# Altium PCB Sonic Sandbox.PcbDoc
Units mm, origin at the board's own origin, x right, y up, seen from the top; angles counter-clockwise.
Board outline 152.4 x 101.6 mm, 2 copper layers (Top Layer, Bottom Layer); 62 components, 47 nets, 175 pads, 0 vias.
Unrouted connection lines stored in the file: 111.
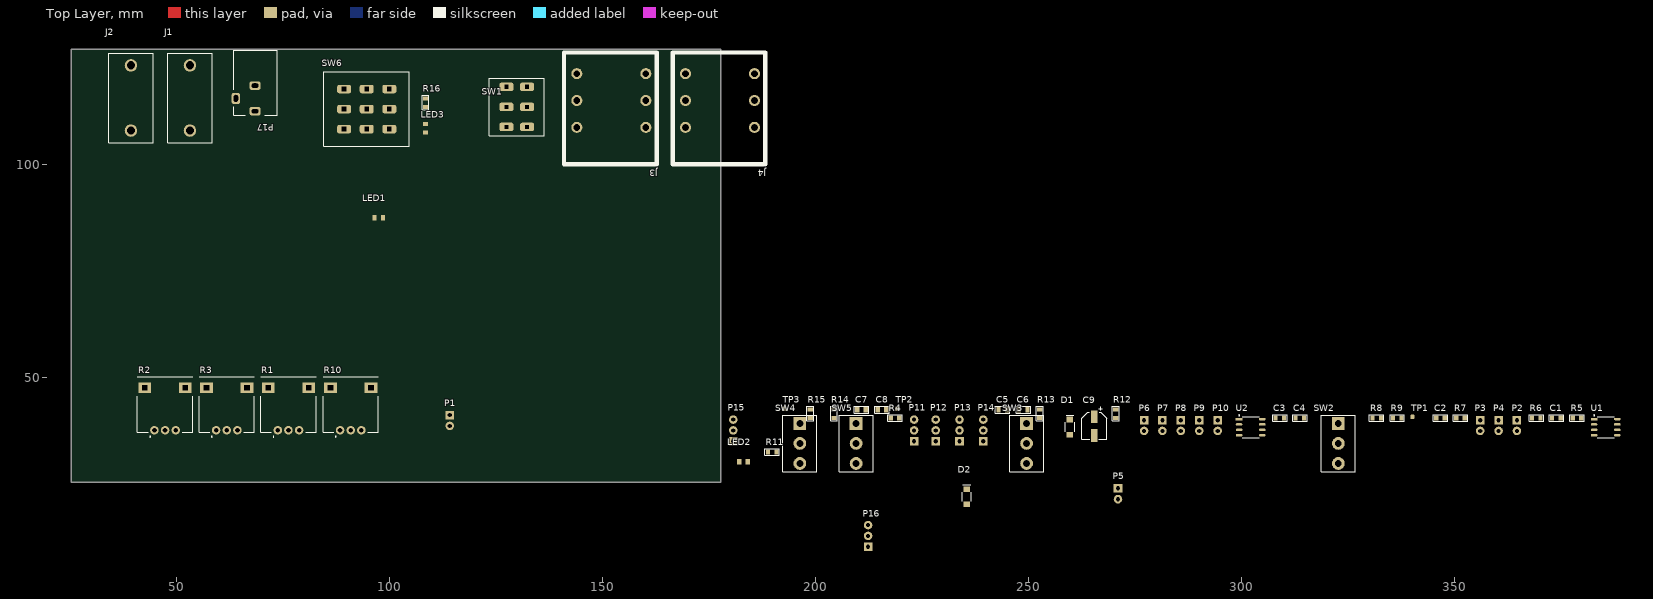
[diagram p0: Top Layer view]
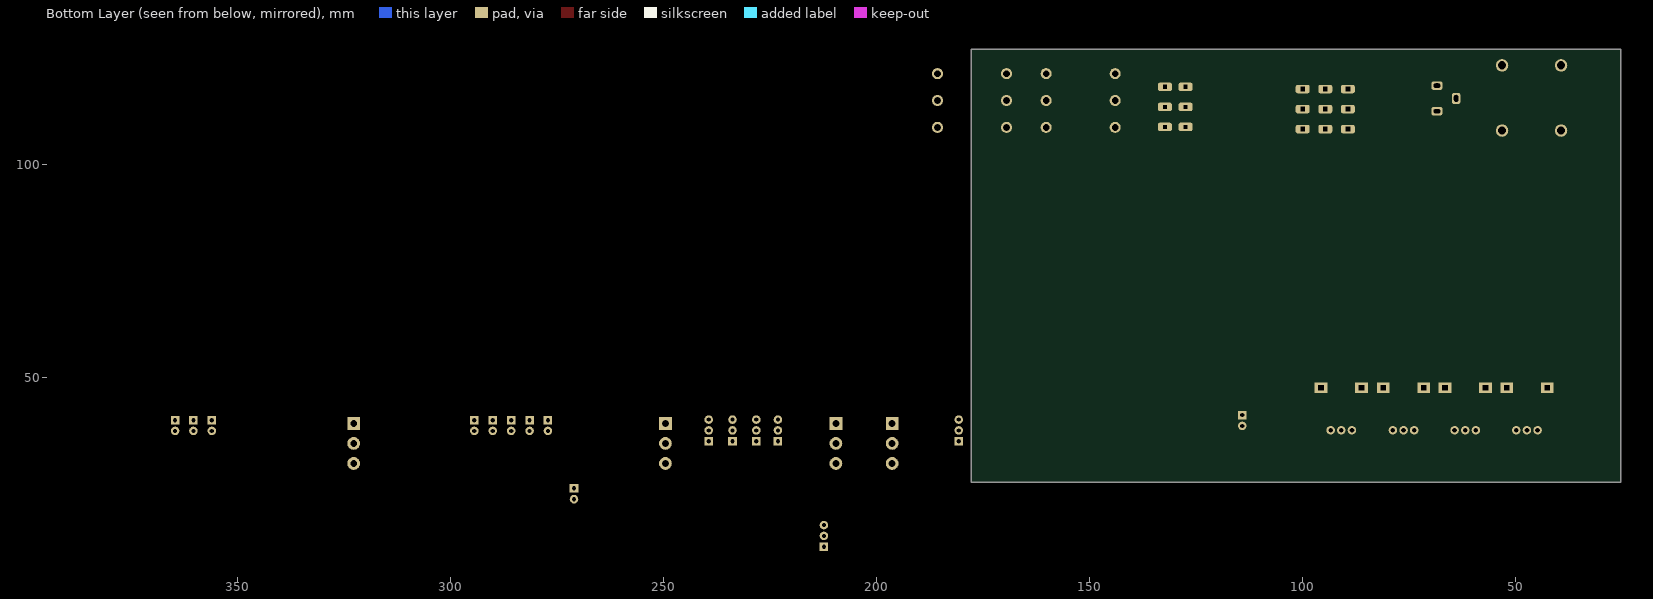
[diagram p1: Bottom Layer view, seen from below]

## Layer stack, top to bottom
Top Solder: solder mask 0.0102, Solder Resist, Dk 3.5
Top Layer: signal copper 0.0356
Dielectric 1: dielectric 0.32, FR-4, Dk 4.8
Bottom Layer: signal copper 0.0356
Bottom Solder: solder mask 0.0102, Solder Resist, Dk 3.5

## Board outline
25.4,25.4 177.8,25.4 177.8,127 25.4,127

## Design rules (kind name [scope] priority, off if disabled: settings)
Clearance [All] p1: gap=0.254 ignorepadtopadclearanceinfootprint=FALSE ismatrix=TRUE
Height [All] p1: minheight=0 maxheight=50 prefheight=12.7
PolygonConnect [All] p1: connectstyle=Relief reliefconductorwidth=0.254 reliefentries=4 polygonreliefangle="90 Angle" airgapwidth=0.254
RoutingVias [All] p1: holewidth=0.711 width=1.27 viastyle="Through Hole" minholewidth=0.711 minwidth=1.27 maxholewidth=0.711 maxwidth=1.27
SolderMaskExpansion [All] p1: expansion=0.102 istentingtop=FALSE
SupplyNets "Schematic Supply Nets_2" [InNet('Vbias')] p1: voltage=0.000
SupplyNets "Schematic Supply Nets_1" [InNet('VCC')] p2: voltage=0.000
SupplyNets "Schematic Supply Nets" [InNet('GND')] p3: voltage=0.000
Width MaxMinWidth_1 [All] p1: maxlimit=0.254 minlimit=0.254 preferedwidth=0.254
29 further rules are at their usual default settings.

## Components (designator, comment, footprint, x,y, rotation, side; value= is the part's Value field where it differs from the comment)
C1 "0805, capacitor" "0805, cap" 372.872,40.513 r0 top value=10n
C2 "0805, capacitor" "0805, cap" 345.694,40.513 r0 top value=10n
C3 "0805, capacitor" "0805, cap" 307.975,40.513 r0 top value=100n
C4 "0805, capacitor" "0805, cap" 312.674,40.513 r0 top value=100n
C5 "0805, capacitor" "0805, cap" 242.951,42.418 r0 top value=1u
C6 "0805, capacitor" "0805, cap" 247.777,42.418 r0 top value=100n
C7 "0805, capacitor" "0805, cap" 209.804,42.418 r0 top value=1u
C8 "0805, capacitor" "0805, cap" 214.63,42.418 r0 top value=1u
C9 "Capacitor, TH 2mm" "Cap, SMD, Polar, 5.3x5.3mm" 265.43,38.608 r0 top value=47u
D1 "BAT48ZFILM" SOD123 259.715,38.354 r90 top
D2 "BAT48ZFILM" SOD123 235.5,22.016 r90 top
J1 "VCC" "Banana Conn VCC" 53.213,107.95 r90 top
J2 "GND" "Banana Conn GND" 39.37,107.95 r90 top
J3 "Audio Stereo Socket" "6.3mm Audio Socket PCB" 144,121.3 r270 top
J4 "Audio Stereo Socket" "6.3mm Audio Socket PCB" 169.5,121.3 r270 top
LED1 "Amber" 0805_led 97.5,87.5 r0 top value="0805 LED"
LED2 "Amber" 0805_led 183.134,30.226 r0 top value="0805 LED"
LED3 "Amber" 0805_led 108.525,108.5 r90 top value="0805 LED"
P1 "1x2 Pin Heade Straight" padtwo_L 114.185,41.192 r0 top value="1x2 Pin Header"
P2 "1x2 Pin Heade Straight" padtwo_L 364.617,40.005 r0 top value="1x2 Pin Header"
P3 "1x2 Pin Heade Straight" padtwo_L 355.981,40.005 r0 top value="1x2 Pin Header"
P4 "1x2 Pin Heade Straight" padtwo_L 360.299,40.005 r0 top value="1x2 Pin Header"
P5 "1x2 Pin Heade Straight" padtwo_L 271,24 r0 top value="1x2 Pin Header"
P6 "1x2 Pin Heade Straight" padtwo_L 277.114,40.005 r0 top value="1x2 Pin Header"
P7 "1x2 Pin Heade Straight" padtwo_L 281.432,40.005 r0 top value="1x2 Pin Header"
P8 "1x2 Pin Heade Straight" padtwo_L 285.75,40.005 r0 top value="1x2 Pin Header"
P9 "1x2 Pin Heade Straight" padtwo_L 290.068,40.005 r0 top value="1x2 Pin Header"
P10 "1x2 Pin Heade Straight" padtwo_L 294.386,40.005 r0 top value="1x2 Pin Header"
P11 "1x3 Pin Header" padThree_L 223.139,37.592 r90 top
P12 "1x3 Pin Header" padThree_L 228.219,37.592 r90 top
P13 "1x3 Pin Header" padThree_L 233.807,37.592 r90 top
P14 "1x3 Pin Header" padThree_L 239.395,37.592 r90 top
P15 "1x3 Pin Header" padThree_L 180.721,37.592 r90 top
P16 "1x3 Pin Header" padThree_L 212.344,12.827 r90 top
P17 "Power socket" "DC Plug PCB" 68.5,112.5 r180 top
R1 "Potentiometer" RK097_15mm 76.339,45.129 r0 top value=0
R2 "Potentiometer" RK097_15mm 47.383,45.129 r0 top value=0
R3 "Potentiometer" RK097_15mm 61.861,45.129 r0 top value=0
R4 "General resistor" 0805 217.678,40.513 r0 top value=1M
R5 "General resistor" 0805 377.698,40.513 r0 top value=100k
R6 "General resistor" 0805 368.173,40.513 r0 top value=4k7
R7 "General resistor" 0805 350.393,40.513 r0 top value=100k
R8 "General resistor" 0805 330.708,40.513 r0 top value=1M
R9 "General resistor" 0805 335.534,40.513 r0 top value=1M
R10 "Potentiometer" RK097_15mm 90.944,45.129 r0 top value=0
R11 "General resistor" 0805 188.849,32.512 r0 top value=4k7
R12 "General resistor" 0805 270.51,40.513 r90 top value=100k
R13 "General resistor" 0805 252.603,40.513 r90 top value=100k
R14 "General resistor" 0805 204.343,40.513 r90 top value=TBD
R15 "General resistor" 0805 198.755,40.513 r90 top value=100k
R16 "General resistor" 0805 108.5,113.5 r90 top value=4k7
SW1 "Mute" SW_DPDT_MTS-202-A2 127.5,108.8 r0 top
SW2 "InMux" SW_SPDT_SMTS-102-A2 322.707,34.544 r0 top
SW3 "OutMux" SW_SPDT_SMTS-102-A2 249.555,34.544 r0 top
SW4 "Switch" SW_SPDT_SMTS-102-A2 196.342,34.544 r0 top
SW5 "Switch" SW_SPDT_SMTS-102-A2 209.55,34.544 r0 top
SW6 "3PDT" SW_3PDT_PBS-24-302 89.4,108.3 r0 top
TP1 "Test Point" TESTPOINT_SMD 340.106,40.767 r90 top value="Test point"
TP2 "Test Point" TESTPOINT_SMD 219.202,42.672 r90 top value="Test point"
TP3 "Test Point" TESTPOINT_SMD 192.659,42.672 r90 top value="Test point"
U1 "LM358" SOIC8 385.445,38.354 r0 top
U2 "AD8666ARZ" SOIC8 302.133,38.354 r0 top

## Footprints (in the part's own frame and the unit in brackets; to place one, negate y for a bottom-side part, rotate by r counter-clockwise, add the part's x,y. Pads: shape width x height; smd on the part's side, far side on the other; paste and mask are expansions set on the pad)
"6.3mm Audio Socket PCB" [mm]
  round 2.6 hole 1.6: R(6.3,16.2) RN(6.3,0) S(0,16.2) SN(0,0) T(12.6,16.2) TN(12.6,0)
  silkscreen extent -5,-3 21.25,18.75, body extent -13.25,-2 20.75,18, height 16.66
0805 [mm]
  rect 1x1.25 smd: 1(0,0) 2(2,0)
  silkscreen extent -0.7,-0.8 2.7,0.8, body extent 0.03,-0.62 2.03,0.63, height 0.5
"0805, cap" [mm]
  rect 1x1.25 smd: 1(0,0) 2(2,0)
  silkscreen extent -0.7,-0.8 2.7,0.8, body extent -0.01,-0.62 1.99,0.63, height 0.8
0805_led [mm]
  rect 1x1.25 smd: 0(-1,0.025) 1(1,0.025)
  body extent -1.03,-0.6 0.99,0.65, height 1.1
"Banana Conn GND" [mm] "571-0100"
  round 2.91 hole 1.94: 1(0,0) 1(15.3,0)
  silkscreen extent -2.8,-5.25 18.1,5.25, body extent -3.7,-5.05 20.3,5.65, height 13
"Banana Conn VCC" [mm] "571-0100"
  round 2.91 hole 1.94: 1(0,0) 1(15.3,0)
  silkscreen extent -2.8,-5.25 18.1,5.25, body extent -3.7,-5.05 20.3,5.65, height 13
"Cap, SMD, Polar, 5.3x5.3mm" [mm] "Wurth WCAP-ASLI series"
  rect 1.6x3 smd: 1(0,-2.2) 2(0,2.2)
  silkscreen extent -2.9,-3.1 2.9,4.5, body extent -2.65,-2.95 2.65,2.95, height 5.41
"DC Plug PCB" [mm]
  rrect50% 2.6x2 hole 1 slot 1.6 at 0 deg: 1(0,0) 2(0,-6)
  rrect50% 2x2.6 hole 1 slot 1.6 at 90 deg: 3(4.5,-3)
  silkscreen extent -5.25,-14.25 5,1, body extent -4.99,-13.83 4.78,0.79, height 10.78
padThree_L [mm] "Pad Diameter 2 mm, Hole  0.3 mm, Pitch 2.54 mm"
  rect 2x2 hole 1: 1(-2.54,0)
  round 2 hole 1: 2(0,0) 3(2.54,0)
  body extent -3.83,-1.38 3.79,1.54, height 8.53
padtwo_L [mm] "Pad Diameter 2 mm, Hole  0.3 mm, Pitch 2.54 mm"
  rect 2x2 hole 1: 1(0,0)
  round 2 hole 1: 2(0,-2.54)
  body extent -1.46,-3.81 1.46,1.27, height 8.51
RK097_15mm [mm] "Vertical Potentiometer"
  round 2 hole 1.1 unplated mask+0.05: 1(-2.5,-7.5) 2(0,-7.5) 3(2.5,-7.5)
  rect 3x2.5 hole 1.2 square unplated mask+0.05: MH(-4.75,2.5) MH(4.75,2.5)
  silkscreen extent -6.5,-9.1 6.5,5, body extent -6.05,-7.65 6.05,4.85, height 25.01
SOD123 [mm]
  rect 1.3x1.5 smd: 1(1.8,0) 2(-1.8,0)
  silkscreen extent -1.1,-1.1 2.8,1.1, body extent -1.85,-0.8 1.85,0.8, height 1.27
SOIC8 [mm] "SOIC, 8-Leads, Body 4,90x3,90mm, Pitch 1,27mm, IPC Medium Density"
  rect 1.55x0.6 smd: 1(-2.725,1.905)
  oval 1.55x0.6 smd: 2(-2.725,0.635) 3(-2.725,-0.635) 4(-2.725,-1.905) 5(2.725,-1.905) 6(2.725,-0.635) 7(2.725,0.635) 8(2.725,1.905)
  silkscreen extent -2.85,-2.5 2,2.88, body extent -3.03,-2.43 2.97,2.47, height 1.75
SW_3PDT_PBS-24-302 [mm]
  rrect50% 3.3x2 hole 1 square: 1(0,0) 2(0,4.7) 3(0,9.4) 4(5.3,0) 5(5.3,4.7) 6(5.3,9.4) 7(10.6,0) 8(10.6,4.7) 9(10.6,9.4)
  silkscreen extent -4.75,-4 15.25,13.5, body extent -4.5,-3.8 15.1,13.2, height 38.5
SW_DPDT_MTS-202-A2 [mm] "Toggle switch DPDT"
  rrect50% 3.3x2 hole 0.9 square: 1(0,0) 2(0,4.7) 3(0,9.4) 4(4.83,0) 5(4.83,4.7) 6(4.83,9.4)
  silkscreen extent -4.09,-2.05 8.91,11.45, body extent -3.94,-1.9 8.76,11.3, height 28.94
SW_SPDT_SMTS-102-A2 [mm]
  rect 3x3 hole 1.6: 1(0,4.7)
  round 3 hole 1.6: 2(0,0) 3(0,-4.7)
  silkscreen extent -4,-6.6 4,6.6, body extent -6,-6.6 6,6.79, height 30.13
TESTPOINT_SMD [mm] "Diameter 2mm, Hole 0.3mm"
  rrect50% 1x1 smd: 0(0,0)

## Part data
C9: "Capacitor TH 2mm"
D1 D2: "Rectifier Diode, Schottky, 1 Phase, 1 Element, 0.35A, 40V V(RRM), Silicon", Forward Voltage=250mV, Manufacturer=STMicroelectronics, Max Operating Temperature=150°C, Max Output current=350mA, Non-rep Pk Forward Current-Max=2A, Package Body Material=Plastic, Package Shape=Rectangular, Package Style="SMALL OUTLINEMeter", Peak Reflow Temperature (Cel)=260°C, Rep Pk Reverse Voltage-Max=40V, Supplier Part Number=7146853P, Time @ Peak Reflow Temperature-Max (s)=30s, Category="Rectifier Diodes", ComponentLink1Description=https://datasheet.ciiva.com:443/pdfs/VipMasterIC/IC/SGST/SGSTS30425/SGSTS30425-1.pdf?src-supplier=IHS+Markit, ComponentLink1URL=https://datasheet.ciiva.com:443/pdfs/VipMasterIC/IC/SGST/SGSTS30425/SGSTS30425-1.pdf?src-supplier=IHS+Markit, ComponentLink2Description=https://datasheet.ciiva.com/16421/cd00130229-16421639.pdf?src-supplier=Future+Electronics, ComponentLink2URL=https://datasheet.ciiva.com/16421/cd00130229-16421639.pdf?src-supplier=Future+Electronics, ComponentLink3Description=https://datasheet.ciiva.com/915/cd00130229-915584.pdf?src-supplier=Digikey, ComponentLink3URL=https://datasheet.ciiva.com/915/cd00130229-915584.pdf?src-supplier=Digikey, ComponentLink4Description=https://datasheet.ciiva.com/915/cd00130229-915585.pdf?src-supplier=Digikey, ComponentLink4URL=https://datasheet.ciiva.com/915/cd00130229-915585.pdf?src-supplier=Digikey, ComponentLink5Description=https://datasheet.ciiva.com/915/cd00130229-915586.pdf?src-supplier=Digikey, ComponentLink5URL=https://datasheet.ciiva.com/915/cd00130229-915586.pdf?src-supplier=Digikey, ComponentLink6Description=https://datasheet.ciiva.com/4714/cd00130229-4714093.pdf?src-supplier=Mouser, ComponentLink6URL=https://datasheet.ciiva.com/4714/cd00130229-4714093.pdf?src-supplier=Mouser, Diode Element Material=SILICON, Diode Type=RECTIFIER, JESD-30 Code=R-PDSO-G2, JESD-609 Code=e3, Manufacturer Part Number=BAT48ZFILM, Number of Elements=1, Pins=2, Pricing="250=2,567, 500=2,311, 1250=2,081, 2500=1,976 (SEK)", Qualification Status="Not Qualified", Reach SVHC Compliant=No, RoHS=Yes, RoHS Compliant=Yes, Stock=13200, Supplier=Rs, Surface Mount=Yes, Technology=SCHOTTKY, Terminal Finish=Tin, Terminal Form="Gull Wing", Terminal Position=DUAL
J1 J2: library part "Banana conn", "Banana Connector 571-0100", Manufacturer_Name=Deltron, Manufacturer_Part_Number=571-0100, Mouser Part Number=164-6218, Datasheet Link=https://www.dem-uk.com/deltron-components/Data/Product_Downloads/deltron-571-0100-4mm-90deg-single-socket-data.pdf, Height=12.4mm, Mouser Price/Stock=https://www.mouser.com/Search/Refine.aspx?Keyword=164-6218
J3 J4: library part "6.3mm Audio Socket"
LED1 LED2 LED3: library part "0805, LED"
P1 P2 P3 P4 P5 P6 P7 P8 P9 P10: "2.54 mm, TH"
P11 P12 P13 P14 P15 P16: "2.54 mm"
R4 R5 R6 R7 R8 R9 R11 R12 R13 R14 R15 R16: library part resistor
SW1: library part "Switch DPDT", "Toggle switch DPDT"
SW2 SW3 SW4 SW5: library part "Switch SPDT", "Toggle switch SPDT"
SW6: library part "Switch 3PDT", "Toggle switch 3PDT"
U1: library part LM358DR, "IC OPAMP GP 700KHZ 8SOIC", Case/Package=SOIC, Dual Supply Voltage=9V, Input Bias Current=250nA, Input Offset Voltage (Vos)=7mV, Manufacturer="Texas Instruments", Max Dual Supply Voltage=16V, Max Operating Temperature=70°C, Max Supply Voltage=32V, Min Dual Supply Voltage=1.5V, Min Operating Temperature=0°C, Min Supply Voltage=3V, Nominal Supply Current=1.2mA, Operating Supply Current=1mA, Output Current=30mA, Package Quantity=2500, Power Supply Rejection Ratio (PSRR)=65dB, Supplier Part Number 1=595-LM358DR, Voltage Gain=100dB, Amplifier Type="GENERAL PURPOSE", Bandwidth=700kHz, Category="Amplifiers - Op Amps, Buffer, Instrumentation", Common Mode Rejection Ratio=65dB, ComponentLink1Description=https://datasheet.ciiva.com/1795/lm358-1795488.pdf?src-supplier=Digi-Key, ComponentLink1URL=https://datasheet.ciiva.com/1795/lm358-1795488.pdf?src-supplier=Digi-Key, ComponentLink2Description=https://datasheet.ciiva.com/27056/2016330-27056228.pdf?src-supplier=Jameco, ComponentLink2URL=https://datasheet.ciiva.com/27056/2016330-27056228.pdf?src-supplier=Jameco, ComponentLink3Description=https://datasheet.ciiva.com/7709/1874566-7709823.pdf?src-supplier=Element14, ComponentLink3URL=https://datasheet.ciiva.com/7709/1874566-7709823.pdf?src-supplier=Element14, ComponentLink4Description=https://datasheet.ciiva.com/46385/1874566-46385851.pdf?src-supplier=Element14, ComponentLink4URL=https://datasheet.ciiva.com/46385/1874566-46385851.pdf?src-supplier=Element14, ComponentLink5Description=https://datasheet.ciiva.com/46390/1874566-46390414.pdf?src-supplier=Element14, ComponentLink5URL=https://datasheet.ciiva.com/46390/1874566-46390414.pdf?src-supplier=Element14, ComponentLink6Description=https://datasheet.ciiva.com/1795/lm358-1795487.pdf?src-supplier=Digi-Key, ComponentLink6URL=https://datasheet.ciiva.com/1795/lm358-1795487.pdf?src-supplier=Digi-Key, ComponentLink7Description=https://datasheet.ciiva.com/1795/lm358-1795489.pdf?src-supplier=Digi-Key, ComponentLink7URL=https://datasheet.ciiva.com/1795/lm358-1795489.pdf?src-supplier=Digi-Key, ComponentLink8Description=https://datasheet.ciiva.com/2973/lm358a-2973386.pdf?src-supplier=Avnet, ComponentLink8URL=https://datasheet.ciiva.com/2973/lm358a-2973386.pdf?src-supplier=Avnet, Contact Plating=Gold, Gain Bandwidth Product=700kHz, Height=1.58mm, Lead Free="Lead Free", Length=4.9mm, Manufacturer Part Number=LM358DR, Mounting Technology="Surface Mount", Number of Amplifiers=2, Number of Channels=2, Number of Circuits=2, Number of Elements=2, Operating Supply Voltage=16V, Output Current per Channel=30mA, Packaging="Tape and Reel", Pins=8, Pricing 1="1=0,37000, 10=0,29900, 50=0,29900, 100=0,18500, 1000=0,11500, 10000=0,10400 (USD)", Radiation Hardening=No, Reach SVHC Compliant=Yes, RoHS=Yes, RoHS Compliant=Yes, Series=-, Slew Rate=0.3V/µs, Stock 1=281120, Supplier 1=Mouser, Supply Current=1.2mA, Technology=BIPOLAR, Unity Gain Bandwidth Product=700kHz, Width=3.91mm
U2: "Operational Amplifier, 2 Func, 5000uV Offset-Max, CMOS, PDSO8", Average Bias Current-Max (IIB)=550pA, Bias Current-Max (IIB) @25C=1pA, Case/Package=SOP, Frequency Compensation=YES, Input Offset Voltage-Max=5mV, Manufacturer="Analog Devices", Max Operating Temperature=125°C, Max Supply Current=4mA, Micropower=No, Min Operating Temperature=-40°C, Neg Supply Voltage Limit-Max=0V, Nominal Supply Voltage=5V, Package Body Material=Plastic, Package Equivalence Code=SOP8,.25, Package Shape=Rectangular, Package Style="SMALL OUTLINEMeter", Peak Reflow Temperature (Cel)=260°C, Power Supplies=+-2.5/+-8/5/16V, Supplier Part Number=584-AD8666ARZ, Supply Voltage Limit-Max=18V, Temperature Grade=AUTOMOTIVE, Time @ Peak Reflow Temperature-Max (s)=30s, Voltage Gain-Min=68000, Amplifier Type="OPERATIONAL AMPLIFIER", Architecture=VOLTAGE-FEEDBACK, Category="Amplifiers - Op Amps, Buffer, Instrumentation", Channels=2, Common-mode Reject Ratio-Nom=100dB, ComponentLink1Description=https://datasheet.ciiva.com:443/pdfs/VipMasterIC/IC/ANDI/ANDIS11402/ANDIS11402-1.pdf?src-supplier=IHS+Markit, ComponentLink1URL=https://datasheet.ciiva.com:443/pdfs/VipMasterIC/IC/ANDI/ANDIS11402/ANDIS11402-1.pdf?src-supplier=IHS+Markit, ComponentLink2Description=https://datasheet.ciiva.com/1487/1481546-1487312.pdf?src-supplier=Element14, ComponentLink2URL=https://datasheet.ciiva.com/1487/1481546-1487312.pdf?src-supplier=Element14, ComponentLink3Description=https://datasheet.ciiva.com/2974/ad8665-ad8666-ad8668-2974734.pdf?src-supplier=Avnet, ComponentLink3URL=https://datasheet.ciiva.com/2974/ad8665-ad8666-ad8668-2974734.pdf?src-supplier=Avnet, ComponentLink4Description=https://datasheet.ciiva.com/1794/ad8665-ad8666-ad8668-1794389.pdf?src-supplier=Digikey, ComponentLink4URL=https://datasheet.ciiva.com/1794/ad8665-ad8666-ad8668-1794389.pdf?src-supplier=Digikey, ComponentLink5Description=https://datasheet.ciiva.com/48705/001249492-da-01-en-ic-opamp-gp-r-r-4mh-ad8666arz-soic-8-adi-48705820.pdf?src-supplier=Conrad, ComponentLink5URL=https://datasheet.ciiva.com/48705/001249492-da-01-en-ic-opamp-gp-r-r-4mh-ad8666arz-soic-8-adi-48705820.pdf?src-supplier=Conrad, Height - Seated (Max)=1.75mm, JESD-30 Code=R-PDSO-G8, JESD-609 Code=e3, Length=4.9mm, Low-Bias=Yes, Low-Offset=No, Manufacturer Part Number=AD8666ARZ, Moisture Sensitivity Level=1, Neg Supply Voltage-Nom (Vsup)=0V, Pins=8, Power=No, Pricing="1=2,83, 10=1,96, 50=1,96, 100=1,63, 1000=1,63, 10000=1,63 (USD)", Programmable Power=No, Qualification Status="Not Qualified", Reach SVHC Compliant=Yes, RoHS=Yes, RoHS Compliant=Yes, Slew Rate=3.5V/µs, Stock=1754, Supplier=Mouser, Surface Mount=Yes, Technology=CMOS, Terminal Finish=Tin, Terminal Form="Gull Wing", Terminal Pitch=1.27mm, Terminal Position=DUAL, Unity Gain BW-Nom=4MHz, Wideband=No, Width=3.9mm
R1 R2 R3 R10: ELFA=300-08-353
TP1 TP2 TP3: Farnell=1702006

## Nets (pads, with @x,y where several pads share a name; then routed paths per layer and width w, separated by ;. In a path a pad name is that pad's centre, name@x,y a point inside that pad or via, vN(x,y) a via of type N, cw(c..) or ccw(c..) an arc to the next point about the centre after c; other vN are vias at no path point)
BananaGND: J2.1 P17.3
FxIn: C3.2 SW2.1 SW6.8
FxIn_int: P5.1 P6.1 P7.1 SW2.2 TP1.0
FxInBuf: C7.1 SW2.3
FxOut: SW1.5 SW6.4
FxOut_int: C4.2 P8.1 P9.1 P10.1 SW3.1
FxOutBuf: R14.1 SW3.3
GND: C1.2 C2.2 C5.2 C6.2 C9.1 J3.S J4.S LED1.0 LED2.0 P1.2 P2.2 P3.2 P4.2 P5.2 P6.2 P7.2 P8.2 P9.2 P10.2 P17.2 R4.1 R7.1 R13.1 R15.2 SW1.3 SW6.1 SW6.9 U1.4 U2.4
NetC3_1: C3.1 R8.1 U2.3
NetC4_1: C4.1 R9.1 U2.5
NetC5_1: C5.1 C6.1 R5.1 R7.2 U1.5
NetC7_2: C7.2 U2.1 U2.2
NetC8_1: C8.1 R14.2 R15.1 TP2.0
NetC8_2: C8.2 U2.6 U2.7
NetD1_2: D1.2 J1.1
NetD2_2: D2.2 P17.1
NetLED1_1: LED1.1 R6.1
NetLED2_1: LED2.1 R11.1
NetLED3_0: LED3.0 SW6.2
NetLED3_1: LED3.1 R16.1
NetP11_1: P11.1 R1.1
NetP11_2: P11.2 R1.2
NetP11_3: P11.3 R1.3
NetP12_1: P12.1 R2.1
NetP12_2: P12.2 R2.2
NetP12_3: P12.3 R2.3
NetP13_1: P13.1 R3.1
NetP13_2: P13.2 R3.2
NetP13_3: P13.3 R3.3
NetP14_1: P14.1 R10.1
NetP14_2: P14.2 R10.2
NetP14_3: P14.3 R10.3
NetP15_1: P15.1 SW4.3
NetP15_2: P15.2 SW4.2
NetP15_3: P15.3 SW4.1
NetP16_1: P16.1 SW5.3
NetP16_2: P16.2 SW5.2
NetP16_3: P16.3 SW5.1
NetR4_2: R4.2 SW1.4
NetR11_2: R11.2 SW1.2
NetR12_1: R12.1 R13.2 U1.3
NetSW1_6: SW1.6 SW3.2 TP3.0
NetU1_1: U1.1 U1.2
SigIn: J3.T SW6.6 SW6.7
SigOut: J4.T SW6.5
Vbias: P3.1 P4.1 R8.2 R9.2 U1.6 U1.7
VCC: C1.1 C2.1 C9.2 D1.1 D2.1 P1.1 P2.1 R5.2 R6.2 R12.2 R16.2 SW1.1 U1.8 U2.8
pads on no net: J3.R J3.RN J3.SN J3.TN J4.R J4.RN J4.SN J4.TN R1.MH R2.MH R3.MH R10.MH SW6.3

## Text inside footprints (layer, text, board x,y; h text height)
P17: Top Assembly "Footprint is correct, model is wrong" at 76.3,110.425 h1 r180